# Altium PCB AIL_REV2.PcbDoc
Units mm, origin at the board's own origin, x right, y up, seen from the top; angles counter-clockwise.
Board outline 35 x 30 mm, 2 copper layers (Top Layer, Bottom Layer); 18 components, 8 nets, 34 pads, 21 vias.
Unrouted connection lines stored in the file: 1.
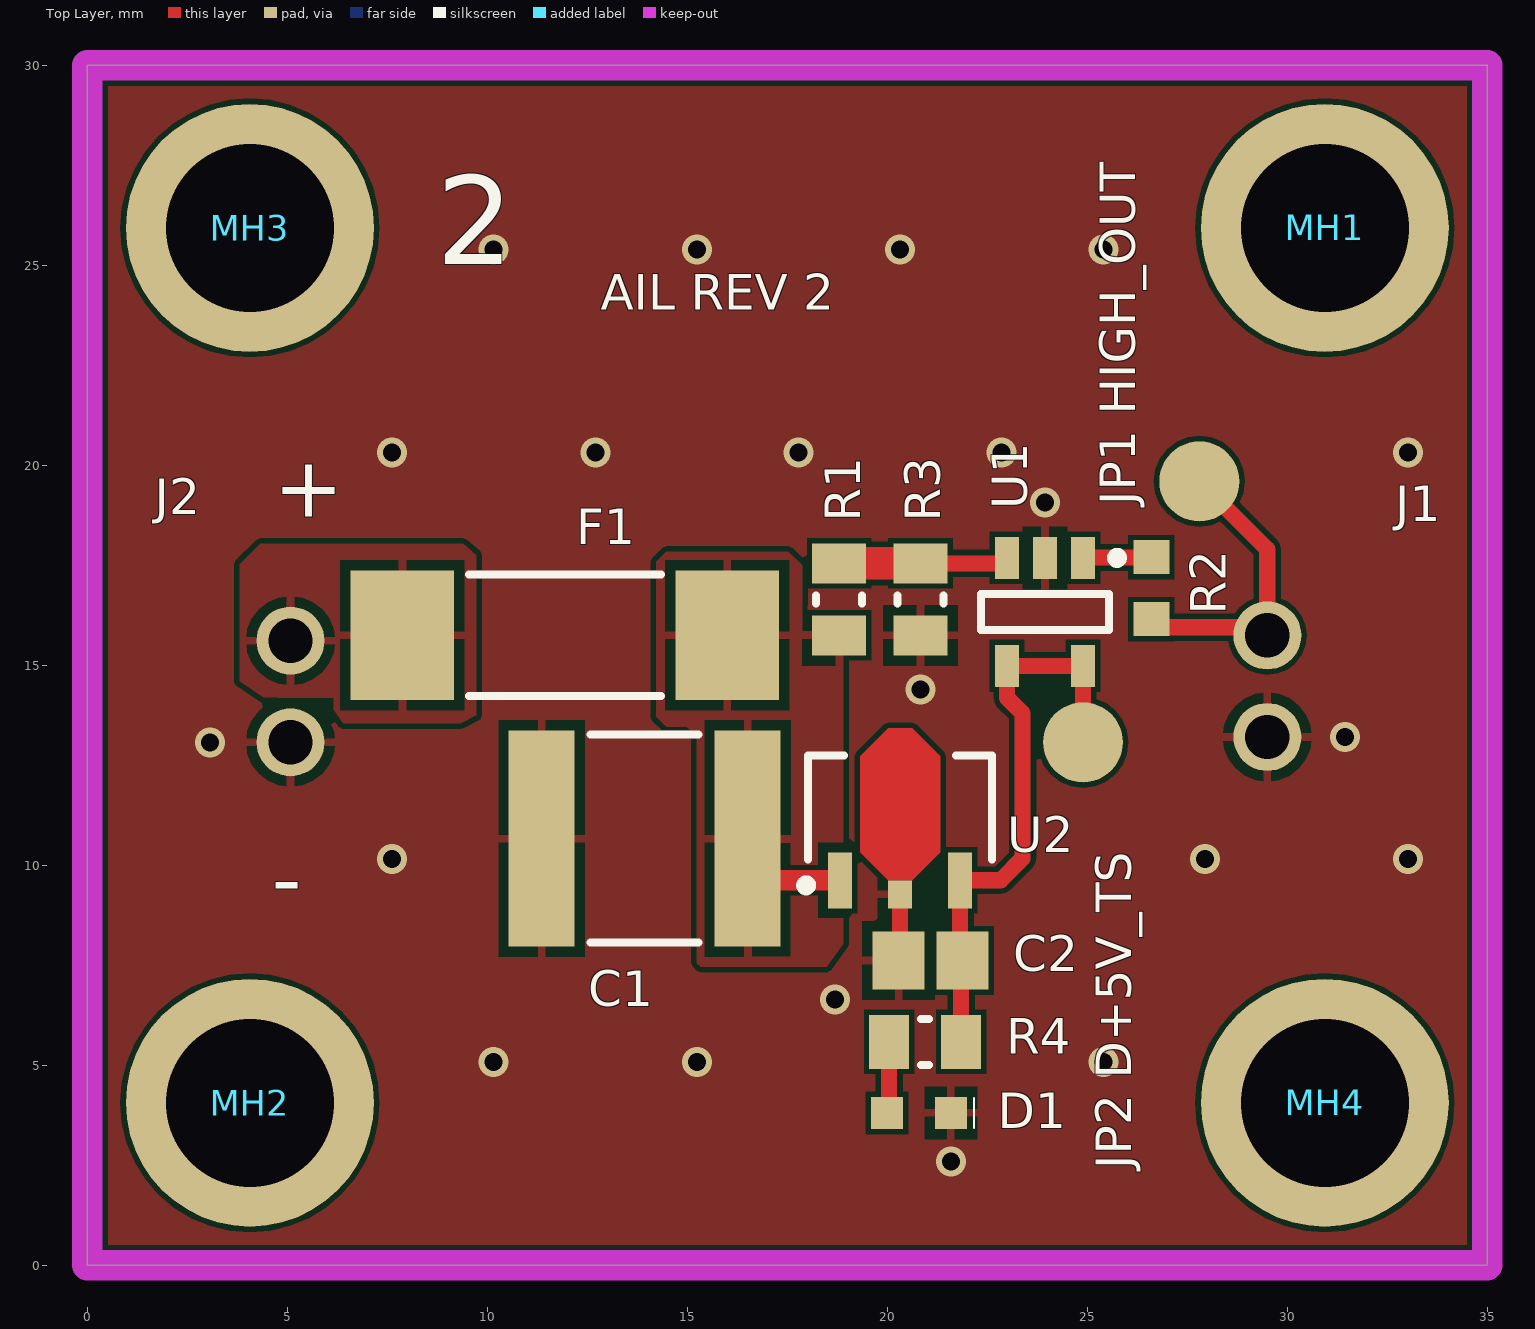
[diagram p0: Top Layer view]
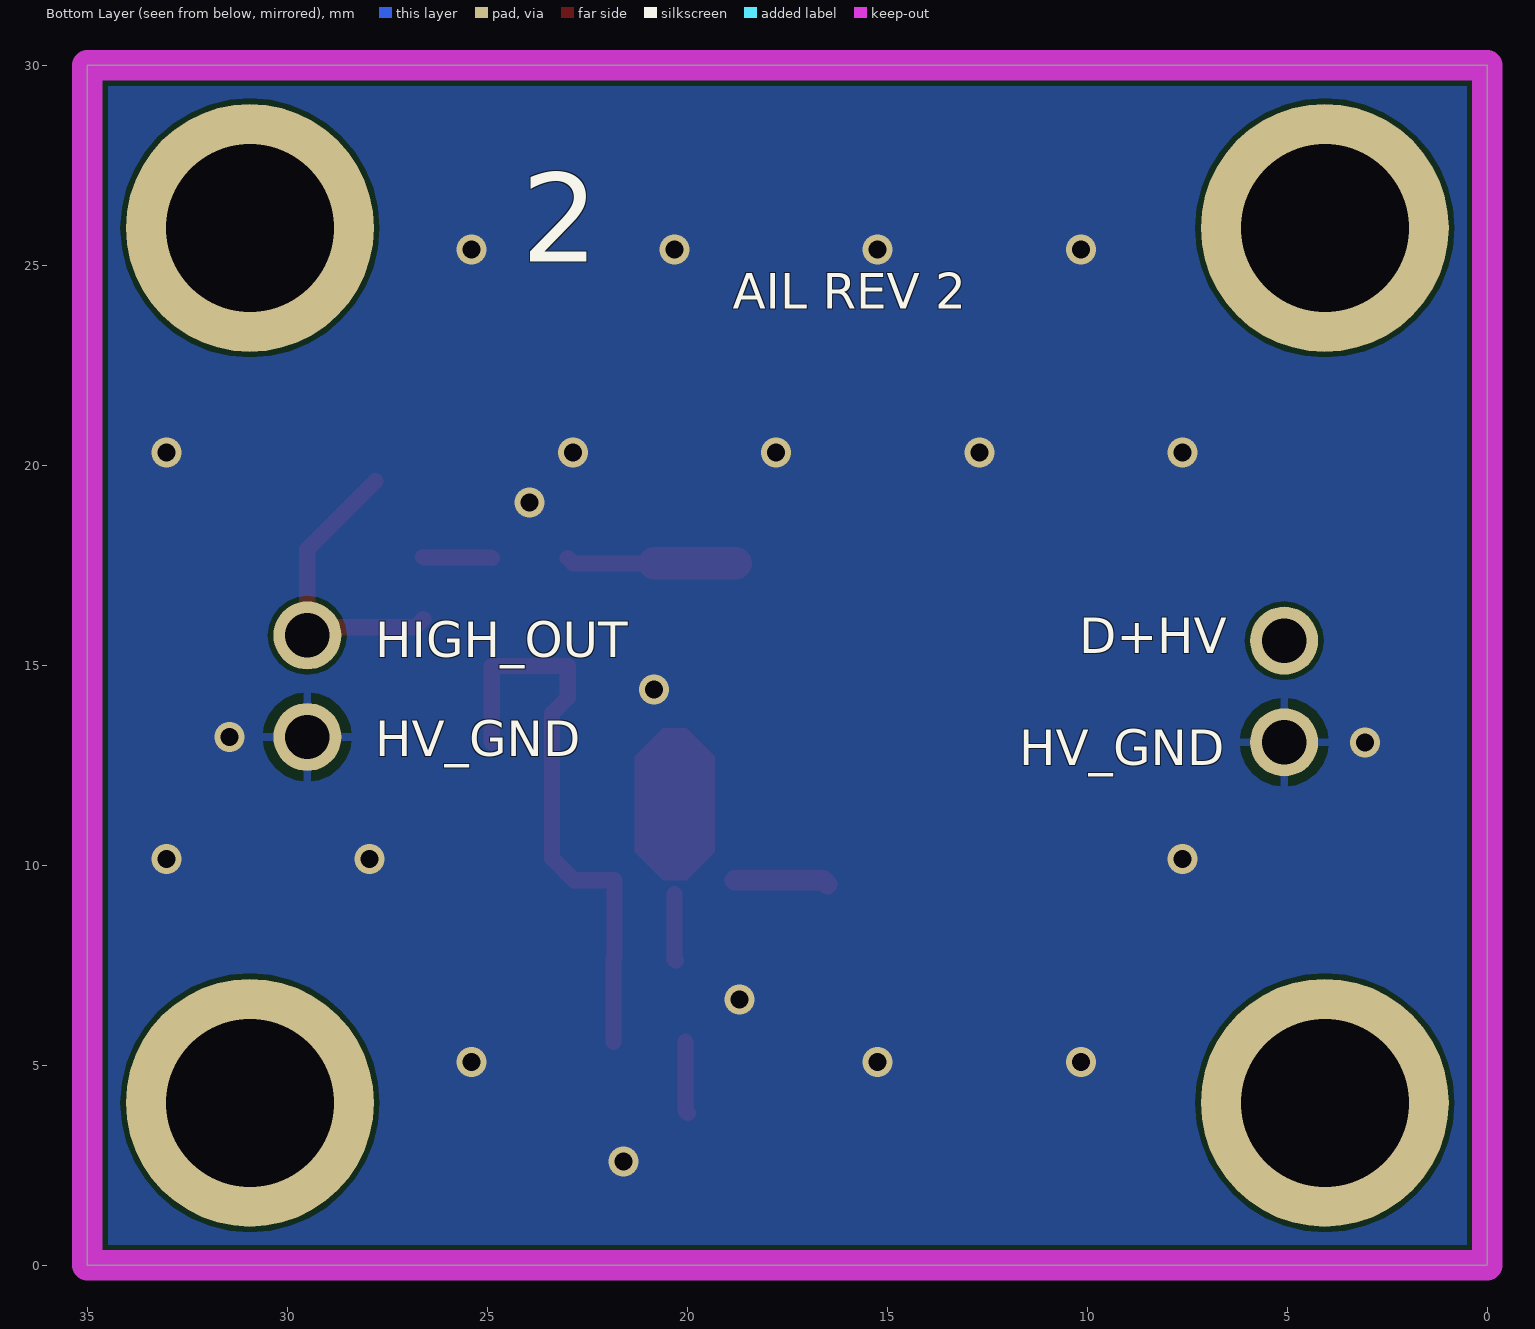
[diagram p1: Bottom Layer view, seen from below]

## Layer stack, top to bottom
Top Solder: solder mask 0.0102, Solder Resist, Dk 3.5
Top Layer: signal copper 0.0356
Dielectric 1: dielectric 0.32, FR-4, Dk 4.8
Bottom Layer: signal copper 0.0356
Bottom Solder: solder mask 0.0102, Solder Resist, Dk 3.5

## Board outline
0,0 0,30 35,30 35,0

## Design rules (kind name [scope] priority, off if disabled: settings)
BoardOutlineClearance [All] p1: gap=0.2 ignorepadtopadclearanceinfootprint=FALSE
Clearance "Stitching HV_GND" [IsStitchingVia and InNet('HV_GND') vs (IsVia and (Not IsStitchingVia)) Or IsPad] p1: gap=0.127 ignorepadtopadclearanceinfootprint=FALSE
Clearance [All] p2: gap=0.127 ignorepadtopadclearanceinfootprint=FALSE except(0.2: Arc-SMDPad Track-SMDPad; 0.25: Arc-Hole Track-Hole SMDPad-Hole THPad-Hole Via-Hole Fill-Hole Poly-Hole Region-Hole Text-Hole; 0.254: Arc-Via Track-Via Via-Via; 0.33: Arc-THPad Track-THPad; 0.54: SMDPad-THPad THPad-THPad)
ComponentClearance [All] p1: gap=0.127 collisioncheckmode=3 verticalgap=0.127 showdistances=TRUE
DiffPairsRouting [All] p1: maxlimit=0.254 minlimit=0.127 mostfreqgap=0.127 toplayer_minwidth=0.127 toplayer_maxwidth=25.4 toplayer_prefwidth=0.127 bottomlayer_minwidth=0.127 bottomlayer_maxwidth=25.4 bottomlayer_prefwidth=0.127 maxuncoupledlength=12.7
Height [All] p1: minheight=0 maxheight=1816.048 prefheight=12.7
HoleSize [All] p1: absolutevalues=TRUE maxlimit=6.3 minlimit=0.3 maxpercent=80.000 minpercent=20.000
HoleToHoleClearance [All] p1: gap=0.25 allowstackedmicrovias=FALSE
MinimumAnnularRing [All] p1: minimumring=0.076
MinimumSolderMaskSliver [All] p1: minsoldermaskwidth=0
PlaneClearance [All] p1: clearance=0.127
PlaneConnect PlaneConnectPowerPads [InPadClass('PowerPads')] p1: planeconnectstyle=Direct reliefexpansion=0.508 reliefentries=4 reliefconductorwidth=0.254 reliefairgap=0.254
PlaneConnect [All] p2: pad.planeconnectstyle=Relief pad.reliefexpansion=0.3 pad.reliefentries=4 pad.reliefconductorwidth=0.254 pad.reliefairgap=0.127 via.planeconnectstyle=Direct via.reliefexpansion=0.3 via.reliefentries=4 via.reliefconductorwidth=0.127 via.reliefairgap=0.127
PolygonConnect PolygonConnectPowerPads [All vs (InPadClass('PowerPads'))] p1: connectstyle=Direct reliefconductorwidth=0.254 reliefentries=4 polygonreliefangle="90 Angle" airgapwidth=0.254
PolygonConnect [All] p2: thpad.connectstyle=Relief thpad.reliefconductorwidth=0.203 thpad.reliefentries=4 thpad.polygonreliefangle="90 Angle" thpad.airgapwidth=0.254 smdpad.connectstyle=Relief smdpad.reliefconductorwidth=0.203 smdpad.reliefentries=4 smdpad.polygonreliefangle="90 Angle" smdpad.airgapwidth=0.254 via.connectstyle=Direct via.reliefconductorwidth=0.203 via.reliefentries=4 via.polygonreliefangle="90 Angle" via.airgapwidth=0.254
RoutingVias [All] p1: holewidth=0.45 width=0.75 viastyle="Through Hole" minholewidth=0.3 minwidth=0.6 maxholewidth=0.6 maxwidth=6.6
SilkToSilkClearance [All] p1: silktosilkclearance=0
SilkToSolderMaskClearance [IsPad] p1: minsilkscreentomaskgap=0.127 clearancetoexposedcopper=TRUE
SolderMaskExpansion SolderMaskExpansion_Via [IsVia] p1: expansion=0.102
SolderMaskExpansion [All] p2: expansion=0.075
Width [All] p1: maxlimit=25.4 minlimit=0.2 preferedwidth=0.406 minimp=50.000000 maximp=50.000000 favimp=50.000000
20 further rules are at their usual default settings.

## Components (designator, comment, footprint, x,y, rotation, side; value= is the part's Value field where it differs from the comment)
C1 "2.2uF" CAP-2220 13.935,10.668 r0 top
C2 "22uF" CAP-0805 21.082,7.62 r0 top
D1 "Green" LED-0603 21.99,4.61 r180 top
F1 "250V 800mA" Fuse-10x3 11.938,15.748 r0 top
J1 "WM4153-ND" 2PIN 29.5,13.208 r90 top
J2 "WM4153-ND" 2PIN 5.08,15.616 r270 top
"JP1 HIGH_OUT" "Testpoint2" TP2 27.8,19.6 r0 top (schematic designator JP1)
"JP2 D+5V_TS" "Testpoint2" TP2 24.892,13.076 r0 top (schematic designator JP2)
MH1 "MountingHole" MH4.2MM#1 78.727,28.41 r0 top
MH2 "MountingHole" MH4.2MM#2 4.064,4.064 r0 top
MH3 "MountingHole" MH4.2MM#3 -19.1,17.9 r0 top
MH4 "MountingHole" MH4.2MM#4 78.029,-0.724 r0 top
R1 "110K" RES-0805 18.796,16.648 r270 top
R2 "665R" RES-0603 26.6,16.93 r270 top
R3 "10K" RES-0805 20.828,16.648 r90 top
R4 "280R" RES-0805 20.944,5.588 r0 top
U1 "497-6777-1-ND" SOT-23-5 23.942,16.336 r270 top
U2 "NCP785AH50T1GOSCT-ND" SOT-89 20.32,11.176 r90 top

## Footprints (in the part's own frame and the unit in brackets; to place one, negate y for a bottom-side part, rotate by r counter-clockwise, add the part's x,y. Pads: shape width x height; smd on the part's side, far side on the other; paste and mask are expansions set on the pad)
2PIN [mm]
  round 1.7 hole 1.11: 1(0,0) 2(2.54,0)
  body extent -2.48,-12.89 4.88,0.7, height 7.06
CAP-0805 [mm] "Chip Capacitor, 2-Leads, Body 2.00x1.25mm, IPC Medium Density"
  rect 1.3x1.45 smd: 1(-0.8,0) 2(0.8,0)
  body extent -1.1,-0.72 1.1,0.72, height 1.35
CAP-2220 [mm] "Chip Capacitor, 2-Leads, Body 5.70x5.00mm, IPC Medium Density"
  rect 1.65x5.4 smd: 1(-2.575,0) 2(2.575,0)
  silkscreen extent -1.35,-2.6 1.35,2.6, body extent -3.05,-2.7 3.05,2.7, height 3.1
Fuse-10x3 [mm] "Chip Inductor, 2-Leads, Body 9.80x3.10mm, IPC Medium Density"
  rect 2.59x3.24 smd: 1(-4.06,0) 2(4.06,0)
  silkscreen extent -2.4,-1.52 2.4,1.52, body extent -5,-1.6 5,1.6, height 3.2
LED-0603 [mm]
  rect 0.8x0.8 smd: 1(2,0.8) 2(0.4,0.8)
  silkscreen extent -0.18,0.43 -0.18,1.17, body extent 0.4,0.4 2,1.2, height 0.7
MH4.2MM#1 [mm] "Mounting Hole, 4.2mm"
  round 6.2 hole 4.2: 1(-47.791,-2.474)
MH4.2MM#2 [mm] "Mounting Hole, 4.2mm"
  round 6.2 hole 4.2: 1(0,0)
MH4.2MM#3 [mm] "Mounting Hole, 4.2mm"
  round 6.2 hole 4.2: 1(23.164,8.036)
MH4.2MM#4 [mm] "Mounting Hole, 4.2mm"
  round 6.2 hole 4.2: 1(-47.093,4.788)
RES-0603 [mm] "Chip Resistor, 2-Leads, Body 1.60x0.80mm, IPC Medium Density"
  rect 0.85x0.9 smd: 1(-0.775,0) 2(0.775,0)
  body extent -0.85,-0.45 0.85,0.45, height 0.55
RES-0805 [mm] "Chip Resistor, 2-Leads, Body 2.00x1.25mm, IPC Medium Density"
  rect 1x1.35 smd: 1(-0.9,0) 2(0.9,0)
  silkscreen extent -0.1,-0.58 0.1,0.58, body extent -1.05,-0.67 1.05,0.67, height 0.6
SOT-23-5 [mm] "SOT23, 5-Leads, Body 3.00x2.75mm, Pitch 0.95mm, IPC Medium Density"
  rect 1.05x0.6 smd: 1(-1.35,0.95) 2(-1.35,0) 3(-1.35,-0.95) 4(1.35,-0.95) 5(1.35,0.95)
  silkscreen extent -1.47,-1.6 0.45,1.93, body extent -1.5,-1.58 1.5,1.58, height 1.1
SOT-89 [mm] "SOT89, 3-Leads, Body 4.50x2.50mm, Pitch 1.50mm, Lead Span 3.6mm, IPC Medium Density"
  rect 1.4x0.6 smd: 1(-1.55,1.5) 3(-1.55,-1.5)
  rect 0.7x0.6 smd: 2(-1.9,0)
  Top Layer region: -1.55,0.3 -0.85,1 1.55,1 2.25,0.3 2.25,-0.3 1.55,-1 -0.85,-1 -1.55,-0.3
  silkscreen extent -1.8,-2.3 1.57,2.47, body extent -2.2,-2.3 2.36,2.3, height 1.8
TP2 [mm]
  round 2 smd: 1(0,0)

## Part data
C1: library part 2220-2.2uF-450V, "CAP CER 2.2UF 450V X6S 2220", Case/Package=2220, Case Code (Metric)=5750, Dielectric=X6S, Manufacturer=TDK, Manufacturer Part Number=C5750X6S2W225K250KA, Max Operating Temperature=105°C, Min Operating Temperature=-55°C, Package Quantity=1, Supplier Part Number 1=445-7781-6-ND, Tolerance=10%, Voltage Rating=450V, Capacitance=2.2uF, Case Code (Imperial)=2220, ComponentLink1Description=http://product.tdk.com/capacitor/mlcc/en/documents/mlcc_commercial_midvoltage_en.pdf?src-supplier=Avnet+Europe, ComponentLink1URL=http://product.tdk.com/capacitor/mlcc/en/documents/mlcc_commercial_midvoltage_en.pdf?src-supplier=Avnet+Europe, Depth=5mm, Height=2.5mm, Lead Free="Lead Free", Length=5.7mm, Mount="Surface Mount", Packaging="Tape and Reel", Pricing 1="1=3.66, 10=2.957, 100=2.258 (USD)", Radiation Hardening=No, REACH SVHC="No SVHC", Stock 1=8149, Supplier 1=Digi-Key, Termination=SMD/SMT, Thickness=0.11inch, Voltage Rating (DC)=450V, Weight=0.016932oz, Width=0.197inch
C2: library part 0805-22uF-10V, "CAP CER 22UF 10V X5R 0805", Case/Package=0805, Case Code (Metric)=2012, Dielectric=X5R, Dielectric Material=Ceramic, Manufacturer=KEMET, Manufacturer Part Number=C0805C226M8PACTU, Max Operating Temperature=85°C, Min Operating Temperature=-55°C, Supplier Part Number 1=399-12069-6-ND, Tolerance=20%, Voltage=10V, Capacitance=22uF, Case Code (Imperial)=0805, ComponentLink1Description=http://www.farnell.com/datasheets/2746360.pdf?src-supplier=Newark, ComponentLink1URL=http://www.farnell.com/datasheets/2746360.pdf?src-supplier=Newark, ComponentLink2Description=http://www.farnell.com/datasheets/2746360.pdf?src-supplier=Farnell, ComponentLink2URL=http://www.farnell.com/datasheets/2746360.pdf?src-supplier=Farnell, ComponentLink3Description=http://www.farnell.com/datasheets/2746360.pdf?src-supplier=Element14, ComponentLink3URL=http://www.farnell.com/datasheets/2746360.pdf?src-supplier=Element14, ComponentLink4Description=https://api.kemet.com/component-edge/download/datasheet/C0805C226M8PAC7800.pdf?src-supplier=Digi-Key, ComponentLink4URL=https://api.kemet.com/component-edge/download/datasheet/C0805C226M8PAC7800.pdf?src-supplier=Digi-Key, ComponentLink5Description=http://www.alliedelec.com/m/d/f3c02ddb98afa3dd1adcb801109671e9.pdf?src-supplier=Allied+Electronics, ComponentLink5URL=http://www.alliedelec.com/m/d/f3c02ddb98afa3dd1adcb801109671e9.pdf?src-supplier=Allied+Electronics, Depth=1.25mm, Dissipation Factor=10%, Height=1.25mm, Lead Free="Lead Free", Length=0.079inch, Mount="Surface Mount", Packaging="Tape and Reel", Pricing 1="1=0.47, 10=0.331, 100=0.2179, 500=0.16142, 1000=0.1372 (USD)", Stock 1=29030, Supplier 1=Digi-Key, Termination=Solder, Thickness=0.055inch, Voltage Rating=10V, Voltage Rating (DC)=10V, Width=0.049inch
D1: library part LED-Green, "LED GREEN CLEAR 0603 SMD", Case/Package=0603, Case Code (Metric)=1608, Forward Current=30mA, Forward Voltage=2V, Manufacturer="Wurth Electronics", Manufacturer Part Number=150060VS75000, Max Operating Temperature=85°C, Min Operating Temperature=-40°C, Package Quantity=1, Supplier Part Number 1=732-4980-1-ND, Test Current=20mA, Case Code (Imperial)=0603, Color=Green, ComponentLink1Description=https://katalog.we-online.de/led/datasheet/150060VS75000.pdf?src-supplier=Digi-Key, ComponentLink1URL=https://katalog.we-online.de/led/datasheet/150060VS75000.pdf?src-supplier=Digi-Key, Dominant Wavelength=570nm, Height=0.7mm, Length=1.6mm, Lens Style=Clear,Rectangular, Luminous Intensity=40mcd, Mount="Surface Mount", Number of Pins=2, Packaging="Tape and Reel", Pricing 1="1=0.14, 50=0.133, 100=0.114, 500=0.099 (USD)", REACH SVHC=Unknown, Stock 1=118118, Supplier 1=Digi-Key, Viewing Angle=140°, Wavelength=570nm, Width=0.8mm
F1: library part "Fuse 250V-0.8A", "FUSE SMT 3912 FAST 250V 800MA", Case/Package=SMD/SMT, Current Rating=800mA, DC Cold Resistance=380mR, Manufacturer=Bel, Manufacturer Part Number=0678D0800-02, Max Operating Temperature=125°C, Min Operating Temperature=-55°C, Voltage Rating (AC)=350V, Voltage Rating (DC)=250V, Approvals=cURus, ComponentLink1Description=https://media.digikey.com/pdf/Data%20Sheets/Bel%20Fuse%20PDFs/0678D_Series.pdf?src-supplier=Digi-Key, ComponentLink1URL=https://media.digikey.com/pdf/Data%20Sheets/Bel%20Fuse%20PDFs/0678D_Series.pdf?src-supplier=Digi-Key, Fuse Type="Board Mount (Cartridge Style Excluded)", Mount="Surface Mount", Packaging="Tape and Reel", Pricing 1="1=0.91, 5=0.884, 10=0.827, 50=0.684, 100=0.57, 250=0.55576, 500=0.47026, 1000=0.41325 (USD)", Stock 1=1992, Supplier 1=Digi-Key
J1 J2: library part 2PIN, "CONN HEADER R/A 2POS 2.54MM", Color=Black, Contact Resistance=30mR, Manufacturer=Molex, Manufacturer Part Number=0705530106, Max Operating Temperature=105°C, Min Operating Temperature=-40°C, ComponentLink1Description=http://www.molex.com/webdocs/datasheets/pdf/en-us/0705530106_PCB_HEADERS.pdf?src-supplier=Avnet+Asia, ComponentLink1URL=http://www.molex.com/webdocs/datasheets/pdf/en-us/0705530106_PCB_HEADERS.pdf?src-supplier=Avnet+Asia, ComponentLink2Description=https://www.molex.com/pdm_docs/ps/PS-70400.pdf?src-supplier=Digi-Key, ComponentLink2URL=https://www.molex.com/pdm_docs/ps/PS-70400.pdf?src-supplier=Digi-Key, Connector Type="Male Pin", Contact Material=Bronze, Contact Mating Length=0.24inch, Contact Plating=Gold, Depth=13.59mm, Housing Color=Black, Housing Material=Polyester, Length=7.37mm, Mount="Through Hole", Number of Contacts=2, Number of Positions=2, Number of Rows=1, Orientation="Right Angle", Packaging=Rail/Tube, Pitch=2.54mm, Pricing 1="1=1.38, 10=1.25, 100=1.071, 500=0.8925, 1000=0.765, 5000=0.6783, 10000=0.663 (USD)", Stock 1=2224, Supplier 1=Digi-Key, Supplier Part Number 1=WM4153-ND, Termination=Solder
"JP1 HIGH_OUT" "JP2 D+5V_TS": "Single layer pad TP"
MH1 MH2 MH3 MH4: library part MH4.2mm, "Mounting hole, 4.2mm", Case=TH
R1: library part 0805-110KR, "RES SMD 110K OHM 1% 1/8W 0805", Case/Package=0805, Case Code (Metric)=2012, Manufacturer=Yageo, Manufacturer Part Number=RC0805FR-07110KL, Max Operating Temperature=155°C, Max Power Dissipation=125mW, Min Operating Temperature=-55°C, Package Quantity=5000, Resistance=110kR, Supplier Part Number 1=311-110KCRDKR-ND, Temperature Coefficient=100ppm/°C, Tolerance=1%, Voltage Rating=150V, Case Code (Imperial)=0805, ComponentLink1Description=http://www.yageo.ru/pdf/RC0805.pdf?src-supplier=Future+Electronics, ComponentLink1URL=http://www.yageo.ru/pdf/RC0805.pdf?src-supplier=Future+Electronics, ComponentLink2Description=http://www.mouser.com/ds/2/447/Yageo_08112016_RC0805-968729.pdf?src-supplier=Mouser, ComponentLink2URL=http://www.mouser.com/ds/2/447/Yageo_08112016_RC0805-968729.pdf?src-supplier=Mouser, ComponentLink3Description=http://www.yageo.com/documents/recent/PYu-RC_Group_51_RoHS_L_9.pdf?src-supplier=Digi-Key, ComponentLink3URL=http://www.yageo.com/documents/recent/PYu-RC_Group_51_RoHS_L_9.pdf?src-supplier=Digi-Key, ComponentLink4Description=http://www.yageo.com/documents/recent/PYu-RC_Group_51_RoHS_L_10.pdf?src-supplier=Digi-Key, ComponentLink4URL=http://www.yageo.com/documents/recent/PYu-RC_Group_51_RoHS_L_10.pdf?src-supplier=Digi-Key, ComponentLink5Description=http://documents.rs-components.com/techlib://itc_doclist_GB.htm?stockno=6185191&src-supplier=RSComponents, ComponentLink5URL=http://documents.rs-components.com/techlib://itc_doclist_GB.htm?stockno=6185191&src-supplier=RSComponents, Composition="Thick Film", Depth=1.25mm, Features="Moisture Resistant", Height=0.024inch, Lead Free="Lead Free", Length=2mm, Military Standard=Not, Mount="Surface Mount", Number of Terminations=2, Packaging="Tape and Reel", Power Rating=125mW, Pricing 1="1=0.1, 10=0.04, 100=0.0163, 1000=0.00731, 2500=0.00635 (USD)", Stock 1=344300, Supplier 1=Digi-Key, Termination=SMD/SMT, Voltage Rating (DC)=150V, Width=0.049inch, Working Voltage=150V
R2: library part 0603-665R, "RES SMD 665 OHM 1% 1/10W 0603", Case/Package=0603, Case Code (Metric)=1608, Manufacturer=Yageo, Manufacturer Part Number=RC0603FR-07665RL, Max Operating Temperature=155°C, Max Power Dissipation=100mW, Min Operating Temperature=-55°C, Package Quantity=1, Supplier Part Number 1=311-665HRDKR-ND, Temperature Coefficient=100ppm/°C, Tolerance=1%, Voltage Rating=75V, Voltage Rating (DC)=50V, Case Code (Imperial)=0603, ComponentLink1Description=http://www.yageo.com/documents/recent/PYu-RC_Group_51_RoHS_L_9.pdf?src-supplier=Digi-Key, ComponentLink1URL=http://www.yageo.com/documents/recent/PYu-RC_Group_51_RoHS_L_9.pdf?src-supplier=Digi-Key, ComponentLink2Description=http://www.yageo.com/documents/recent/PYu-RC0603_51_RoHS_L_4.pdf?src-supplier=Avnet, ComponentLink2URL=http://www.yageo.com/documents/recent/PYu-RC0603_51_RoHS_L_4.pdf?src-supplier=Avnet, ComponentLink3Description=http://www.yageo.com/documents/recent/PYu-RC_Group_51_RoHS_L_10.pdf?src-supplier=Digi-Key, ComponentLink3URL=http://www.yageo.com/documents/recent/PYu-RC_Group_51_RoHS_L_10.pdf?src-supplier=Digi-Key, ComponentLink4Description=http://www.yageo.com/documents/recent/PYu-RC0603_51_RoHS_L_4.pdf?src-supplier=Avnet+Europe, ComponentLink4URL=http://www.yageo.com/documents/recent/PYu-RC0603_51_RoHS_L_4.pdf?src-supplier=Avnet+Europe, Composition="Thick Film", Contact Plating=Tin,Matte, Depth=0.8mm, Features="Moisture Resistant", Height=0.022inch, Lead Free="Lead Free", Length=1.6mm, Military Standard=Not, Number of Terminations=2, Packaging="Tape and Reel", Power Rating=100mW, Pricing 1="1=0.1, 10=0.023, 100=0.0094, 1000=0.00421, 2500=0.00366 (USD)", Resistance=665R, Stock 1=143871, Supplier 1=Digi-Key, Termination=SMD/SMT, Weight=7.1E-05oz, Width=0.8mm
R3: library part 0805-10KR, "RES SMD 10K OHM 1% 1/8W 0805", Case/Package=0805, Case Code (Metric)=2012, Manufacturer=Yageo, Manufacturer Part Number=RC0805FR-0710KL, Max Operating Temperature=155°C, Max Power Dissipation=125mW, Min Operating Temperature=-55°C, Package Quantity=1, Resistance=10kR, Supplier Part Number 1=311-10.0KCRCT-ND, Temperature Coefficient=100ppm/°C, Tolerance=1%, Voltage Rating=150V, Case Code (Imperial)=0805, ComponentLink1Description=http://www.yageo.com/documents/recent/PYu-RC_Group_51_RoHS_L_9.pdf?src-supplier=Mouser, ComponentLink1URL=http://www.yageo.com/documents/recent/PYu-RC_Group_51_RoHS_L_9.pdf?src-supplier=Mouser, ComponentLink2Description=http://www.farnell.com/datasheets/2167052.pdf?src-supplier=Element14, ComponentLink2URL=http://www.farnell.com/datasheets/2167052.pdf?src-supplier=Element14, ComponentLink3Description=http://www.yageo.com/documents/recent/PYu-RC_Group_51_RoHS_L_10.pdf?src-supplier=Digi-Key, ComponentLink3URL=http://www.yageo.com/documents/recent/PYu-RC_Group_51_RoHS_L_10.pdf?src-supplier=Digi-Key, ComponentLink4Description=http://www.yageo.ru/pdf/RC0805.pdf?src-supplier=Future+Electronics, ComponentLink4URL=http://www.yageo.ru/pdf/RC0805.pdf?src-supplier=Future+Electronics, Composition="Thick Film", Depth=1.25mm, Features="Moisture Resistant", Height=0.024inch, Lead Free="Lead Free", Length=2mm, Military Standard=Not, Number of Terminations=2, Packaging="Tape and Reel", Power Rating=125mW, Pricing 1="1=0.1, 10=0.04, 100=0.0163, 1000=0.00731, 2500=0.00635 (USD)", REACH SVHC=Unknown, Stock 1=26112993, Supplier 1=Digi-Key, Termination=SMD/SMT, Width=0.049inch
R4: library part 0805-280R, "RES SMD 280 OHM 1% 1/8W 0805", Case/Package=0805, Case Code (Metric)=2012, Manufacturer=Yageo, Manufacturer Part Number=RC0805FR-07280RL, Max Operating Temperature=155°C, Max Power Dissipation=125mW, Min Operating Temperature=-55°C, Package Quantity=1, Supplier Part Number 1=311-280CRDKR-ND, Temperature Coefficient=100ppm/°C, Tolerance=1%, Voltage Rating=150V, Case Code (Imperial)=0805, ComponentLink1Description=http://www.yageo.ru/pdf/RC0805.pdf?src-supplier=Mouser, ComponentLink1URL=http://www.yageo.ru/pdf/RC0805.pdf?src-supplier=Mouser, ComponentLink2Description=http://www.yageo.ru/pdf/RC0805.pdf?src-supplier=Future+Electronics, ComponentLink2URL=http://www.yageo.ru/pdf/RC0805.pdf?src-supplier=Future+Electronics, ComponentLink3Description=http://www.yageo.com.tw/exep/pages/download/literatures/PYu-R_INT-thick_7.pdf?src-supplier=Digi-Key, ComponentLink3URL=http://www.yageo.com.tw/exep/pages/download/literatures/PYu-R_INT-thick_7.pdf?src-supplier=Digi-Key, ComponentLink4Description=http://www.yageo.com/documents/recent/PYu-RC_Group_51_RoHS_L_9.pdf?src-supplier=Digi-Key, ComponentLink4URL=http://www.yageo.com/documents/recent/PYu-RC_Group_51_RoHS_L_9.pdf?src-supplier=Digi-Key, Composition="Thick Film", Depth=1.25mm, Features="Moisture Resistant", Height=0.024inch, Lead Free="Lead Free", Length=2mm, Military Standard=Not, Number of Terminations=2, Packaging="Tape and Reel", Power Rating=125mW, Pricing 1="1=0.1, 10=0.04, 100=0.0163, 1000=0.00731, 2500=0.00635 (USD)", Resistance=280R, Stock 1=43663, Supplier 1=Digi-Key, Termination=SMD/SMT, Voltage Rating (DC)=150V, Width=1.25mm
U1: library part Compare-TS861ILT, "IC COMPARATOR R-R MCRPWR SOT23-5", Case/Package=SOT-23, Input Bias Current=300pA, Input Offset Voltage (Vos)=15mV, Manufacturer=STMicroelectronics, Manufacturer Part Number=TS861ILT, Max Operating Temperature=85°C, Max Power Dissipation=500mW, Max Supply Current=12uA, Max Supply Voltage=10V, Min Operating Temperature=-40°C, Min Supply Voltage=2.7V, Nominal Supply Current=14uA, Output Current=5mA, Package Quantity=3000, Power Supply Rejection Ratio (PSRR)=80dB, Quiescent Current=16uA, Supplier Part Number 1=497-6777-6-ND, Voltage Gain=240dB, Common Mode Rejection Ratio=70dB, ComponentLink1Description=http://www.farnell.com/datasheets/1690531.pdf?src-supplier=Element14, ComponentLink1URL=http://www.farnell.com/datasheets/1690531.pdf?src-supplier=Element14, ComponentLink2Description=http://www.st.com/content/ccc/resource/technical/document/datasheet/dd/d1/7d/d5/d5/ce/49/c5/CD00001705.pdf/files/CD00001705.pdf/jcr:content/translations/en.CD00001705.pdf?src-supplier=Digi-Key, ComponentLink2URL=http://www.st.com/content/ccc/resource/technical/document/datasheet/dd/d1/7d/d5/d5/ce/49/c5/CD00001705.pdf/files/CD00001705.pdf/jcr:content/translations/en.CD00001705.pdf?src-supplier=Digi-Key, ComponentLink3Description=http://www.mouser.com/ds/2/389/ts861-957384.pdf?src-supplier=Mouser, ComponentLink3URL=http://www.mouser.com/ds/2/389/ts861-957384.pdf?src-supplier=Mouser, ComponentLink4Description=https://www.verical.com/server-webapp/html/getDatasheet?partID=160028&src-supplier=Verical, ComponentLink4URL=https://www.verical.com/server-webapp/html/getDatasheet?partID=160028&src-supplier=Verical, ComponentLink5Description=http://www.produktinfo.conrad.com/datenblaetter/1100000-1199999/001185659-da-01-en-IC_COMPARATOR_R_R_TS861ILT_SOT_23_5_STM.pdf?src-supplier=Conrad, ComponentLink5URL=http://www.produktinfo.conrad.com/datenblaetter/1100000-1199999/001185659-da-01-en-IC_COMPARATOR_R_R_TS861ILT_SOT_23_5_STM.pdf?src-supplier=Conrad, Lead Free="Lead Free", Max Input Current=300pA, Mount="Surface Mount", Number of Channels=1, Number of Elements=1, Number of Pins=5, Output Current per Channel=5mA, Packaging="Tape and Reel", Power Dissipation=500mW, Pricing 1="1=0.78, 10=0.682, 25=0.6412, 100=0.486, 250=0.4136, 500=0.39292, 1000=0.29986 (USD)", Propagation Delay=2us, Radiation Hardening=No, REACH SVHC="No SVHC", Response Time=500ns, Stock 1=14868, Supplier 1=Digi-Key, Type="General Purpose"
U2: library part LDO-12V-10mA, "IC REG LINEAR 5V 10MA SOT89-3", Case/Package=SOT-89, Manufacturer="ON Semiconductor", Manufacturer Part Number=NCP785AH120T1G, Max Input Voltage=450V, Max Operating Temperature=85°C, Max Output Current=10mA, Min Current Limit=10.5mA, Min Input Voltage=85V, Min Input Voltage (DC)=55V, Min Operating Temperature=-40°C, Nominal Output Voltage=12V, Package Quantity=2500, Power Supply Rejection Ratio (PSRR)=70dB, Quiescent Current=22uA, Reference Voltage=1.25V, Supplier Part Number 1=NCP785AH50T1GOSDKR-ND, Accuracy=5%, ComponentLink1Description=http://www.onsemi.com/pub/Collateral/NCP785A-D.PDF?src-supplier=Digi-Key, ComponentLink1URL=http://www.onsemi.com/pub/Collateral/NCP785A-D.PDF?src-supplier=Digi-Key, ComponentLink2Description=http://www.farnell.com/datasheets/1948370.pdf?src-supplier=Farnell, ComponentLink2URL=http://www.farnell.com/datasheets/1948370.pdf?src-supplier=Farnell, ComponentLink3Description=http://www.farnell.com/datasheets/1948370.pdf?src-supplier=Element14, ComponentLink3URL=http://www.farnell.com/datasheets/1948370.pdf?src-supplier=Element14, ComponentLink4Description=http://uk.rs-online.com/webdocs/141c/0900766b8141c022.pdf?src-supplier=RSComponents, ComponentLink4URL=http://uk.rs-online.com/webdocs/141c/0900766b8141c022.pdf?src-supplier=RSComponents, ComponentLink5Description=http://www.onsemi.com/pub/Collateral/NCP785A-D.PDF?src-supplier=Avnet, ComponentLink5URL=http://www.onsemi.com/pub/Collateral/NCP785A-D.PDF?src-supplier=Avnet, ComponentLink6Description=http://www.mouser.com/ds/2/308/NCP785A-D-532012.pdf?src-supplier=Mouser, ComponentLink6URL=http://www.mouser.com/ds/2/308/NCP785A-D-532012.pdf?src-supplier=Mouser, ComponentLink7Description=http://www.farnell.com/datasheets/2578399.pdf?src-supplier=Newark, ComponentLink7URL=http://www.farnell.com/datasheets/2578399.pdf?src-supplier=Newark, ComponentLink8Description=http://www.onsemi.com/pub/Collateral/NCP785A-D.PDF?src-supplier=Avnet+Asia, ComponentLink8URL=http://www.onsemi.com/pub/Collateral/NCP785A-D.PDF?src-supplier=Avnet+Asia, Contact Plating=Tin,Matte, Height=1.6mm, Lead Free="Lead Free", Length=4.6mm, Max Input Voltage (DC)=450V, Mount="Surface Mount", Number of Outputs=1, Number of Pins=3, Number of Regulators=1, Output Current=10mA, Output Type=Fixed, Output Voltage=12V, Packaging="Cut Tape", Polarity=Positive, Pricing 1="1=0.83, 10=0.738, 25=0.7, 100=0.5375, 250=0.475, 500=0.45, 1000=0.35 (USD)", REACH SVHC="No SVHC", Stock 1=1643, Supplier 1=Digi-Key, Weight=0.004603oz, Width=2.6mm

## Via types
v1: diameter 0.75, hole 0.45, Top Layer to Bottom Layer, tented both sides, 21 vias

## Nets (pads, with @x,y where several pads share a name; then routed paths per layer and width w, separated by ;. In a path a pad name is that pad's centre, name@x,y a point inside that pad or via, vN(x,y) a via of type N, cw(c..) or ccw(c..) an arc to the next point about the centre after c; other vN are vias at no path point)
D+5V_TS: "JP2 D+5V_TS.1" C2.2 R4.2 U1.4 U1.5 U2.3 | length 14.6
  Top Layer w0.406: R4.2 21.844,7.658 21.82,7.682 U2.3 22.834,9.626 23.381,10.173 23.381,13.802 22.992,14.191 U1.4 U1.5 24.892,13.076
D+HV: F1.1 J2.1
HIGH_OUT: "JP1 HIGH_OUT.1" J1.2 R2.2 | length 7.6
  Top Layer w0.406: R2.2 26.804,15.952 29.296,15.952 J1.2 29.5,17.9 27.8,19.6
HV_GND: C1.1 C2.1 D1.2 J1.1 J2.2 R3.1 U1.2 U2.2 | length 1.7
  Top Layer w0.406: C2.1 20.32,7.658 U2.2
  other v1: 21.59,2.594 10.16,5.08 15.24,5.08 25.4,5.08 18.694,6.641 7.62,10.16 27.94,10.16 33.02,10.16 3.064,13.076 31.442,13.208 20.828,14.4 23.942,19.074 7.62,20.32 12.7,20.32 17.78,20.32 22.86,20.32 33.02,20.32 10.16,25.4 15.24,25.4 20.32,25.4 25.4,25.4
HV_IN: R1.1 R3.2 U1.3 | length 4.3
  Top Layer w0.406: R3.2 22.854,17.548 U1.3
  Top Layer w0.813: R1.1 R3.2
NetD1_1: D1.1 R4.1 | length 1.8
  Top Layer w0.406: D1.1 20.044,3.864 R4.1
OPTO_OUT: R2.1 U1.1 | length 1.7
  Top Layer w0.406: U1.1 24.902,17.696 26.59,17.696 R2.1
TS: C1.2 F1.2 R1.2 U2.1 | length 2.4
  Top Layer w0.508: C1.2@16.497,9.525 16.598,9.626 U2.1
pads on no net: MH1.1 MH2.1 MH3.1 MH4.1

## Polygon pours and split planes (outlines as drawn)
HV_GND on Top Layer "Top Layer-HV_GND" (solid, pour order 14): 0,0 0,30 35,30 35,0
D+HV on Top Layer "Top Layer-D+60V_HV" (solid, pour order 6): 5.335,14.191 5.531,14.191 6.156,14.191 6.156,13.884 6.4,13.55 9.33,13.55 9.72,13.75 9.72,17.755 9.398,18.034 4.318,18.034 3.81,17.526 3.81,14.6 4.4,14.2 4.77,14.191 4.905,14.191
TS on Top Layer "Top Layer-TS" (solid, pour order 12): 15.24,7.468 18.482,7.468 18.898,8.039 18.898,16.364 17.869,16.364 17.869,17.497 17.526,17.84 14.478,17.84 14.224,17.586 14.224,13.716 14.478,13.462 14.986,13.462 15.24,13.208 15.24,7.709
HV_GND on Bottom Layer "Bottom Layer-HV_GND" (solid, pour order 16): 0,0 0,30 35,30 35,0

## Keep-outs
Keep-Out Layer:
  the board outline again, w0.762

## Silkscreen, mask and mechanical layers (free items; w line width, h text height)
Top Overlay:
  text "2" at 8.725,24.305 h3.81
  text "AIL REV 2" at 12.84,23.886 h0.89
  text "+" at 4.665,18.711 h1.52
  text "-" at 4.61,8.928 h1.52
Bottom Overlay:
  text "2" at 24.156,24.368 h3.81
  text "AIL REV 2" at 18.86,23.911 h0.89
  text "D+HV" at 10.2,15.3 h0.89
  text "HIGH_OUT" at 27.8,15.2 h0.89
  text "HV_GND" at 27.8,12.726 h0.89
  text "HV_GND" at 11.7,12.5 h0.89
Board Outline:
  the board outline again, w0.762

## Dimensions
0,30 to 0,0 on Drill Guide
0,30 to 35,30 on Drill Guide